# EAGLE board xbee_remote (EAGLE 6.3)
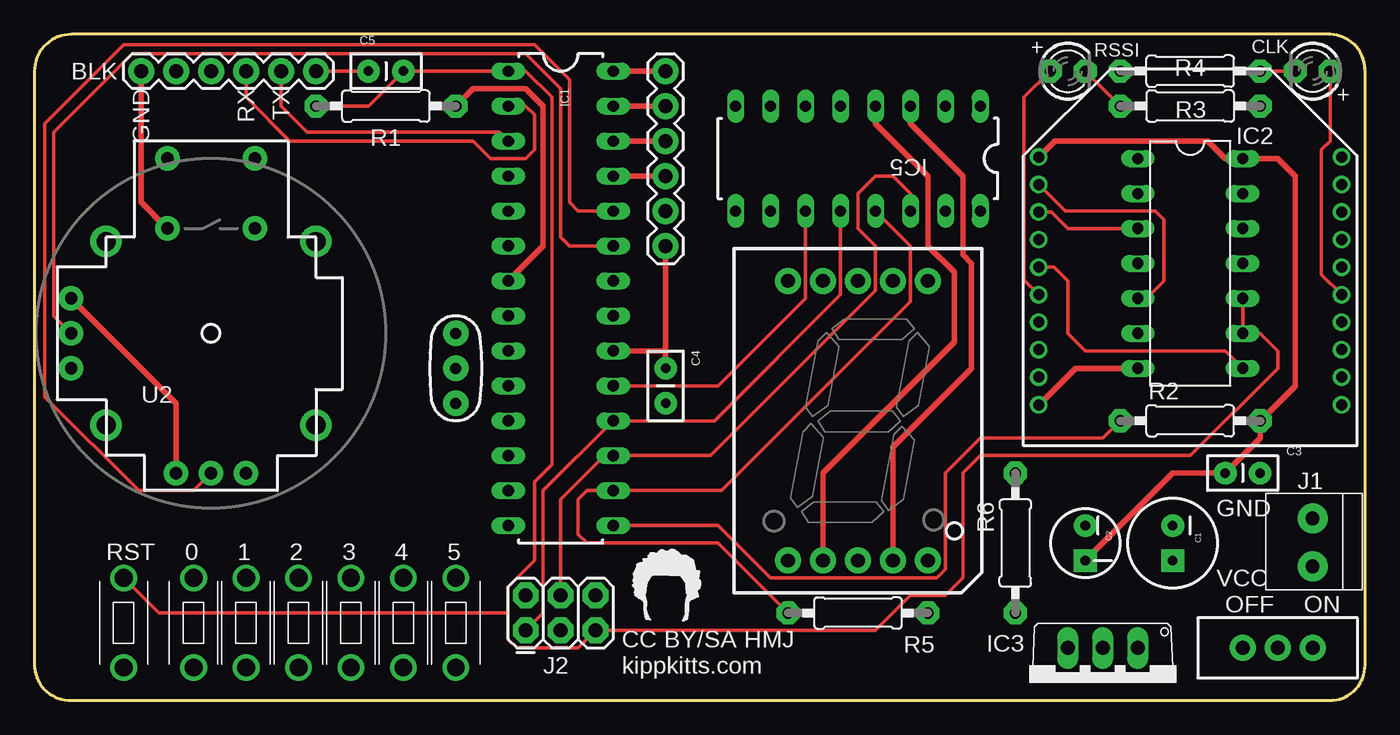
[diagram p0: board, top side]
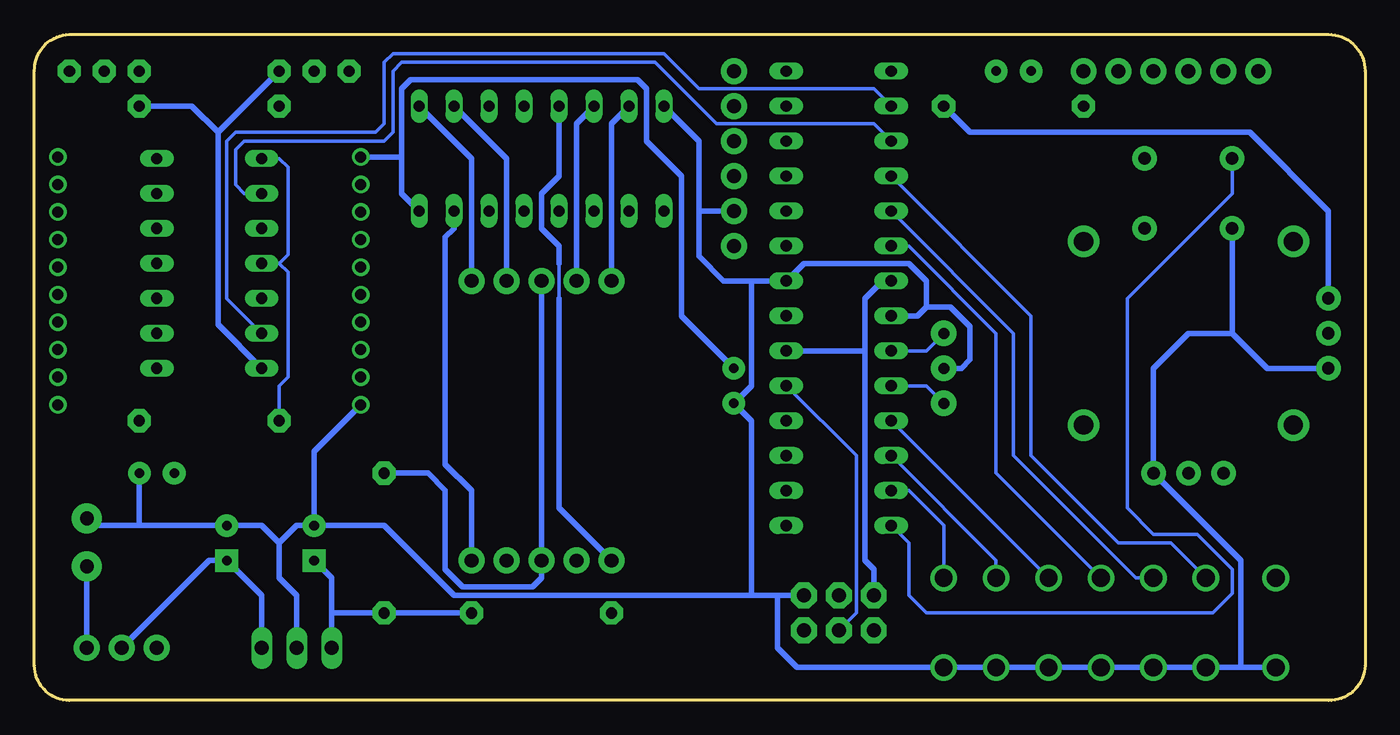
[diagram p1: board, bottom side, seen from below]

Size 96.65 x 48.39 mm. Coordinates in mm from the lower left corner, seen from the top.
Outline: 0,2.54 arc90 2.67,0 94.11,0 arc90 96.65,2.54 96.65,45.72 arc90 94.11,48.39 2.67,48.39 arc90 0,45.72 0,2.54
Copper layers (1*16): Top 0.0178mm / dielectric 59mil / Bottom 0.0178mm
Design rules "default": minimum track width 6mil, minimum drill 14mil, track to track 6mil, track to pad 6mil, pad to pad 6mil, via to via 6mil, smd to smd 6mil, copper to edge 20mil, drill to drill 16mil, minimum pad ring 8mil, minimum via ring 8mil, stop-mask expansion 3mil, vias tented up to drill 0mil, thermal gap 10mil

## Footprints (pad centres in the part's own frame; a part is rotated, then mirrored left to right if it is on the bottom)
CPOL-RADIAL-100UF-25V = drill 0.7 pad 1.651 square: 1 1.27,0 | drill 0.7 pad 1.651: 2 -1.27,0
CPOL-RADIAL-10UF-25V = drill 0.7 pad 1.651 square: 1 1.27,0 | drill 0.7 pad 1.651: 2 -1.27,0
CAP-PTH-SMALL2 = drill 0.7 pad 1.651: 1 0,0; 2 2.54,0
LED3MM = drill 0.813 pad 1.676 octagon: A -1.27,0; K 1.27,0
DIL28-3 = drill 0.813 long: 1 -16.51,-3.81; 2 -13.97,-3.81; 3 -11.43,-3.81; 4 -8.89,-3.81; 5 -6.35,-3.81; 6 -3.81,-3.81; 7 -1.27,-3.81; 8 1.27,-3.81; 9 3.81,-3.81; 10 6.35,-3.81; 11 8.89,-3.81; 12 11.43,-3.81; 13 13.97,-3.81; 14 16.51,-3.81; 15 16.51,3.81; 16 13.97,3.81; 17 11.43,3.81; 18 8.89,3.81; 19 6.35,3.81; 20 3.81,3.81; 21 1.27,3.81; 22 -1.27,3.81; 23 -3.81,3.81; 24 -6.35,3.81; 25 -8.89,3.81; 26 -11.43,3.81; 27 -13.97,3.81; 28 -16.51,3.81
DIL14 = drill 0.813 long: 1 -7.62,-3.81; 2 -5.08,-3.81; 3 -2.54,-3.81; 4 0,-3.81; 5 2.54,-3.81; 6 5.08,-3.81; 7 7.62,-3.81; 8 7.62,3.81; 9 5.08,3.81; 10 2.54,3.81; 11 0,3.81; 12 -2.54,3.81; 13 -5.08,3.81; 14 -7.62,3.81
TO220V = drill 1.016 long: 1 -2.54,-2.54; 2 0,-2.54; 3 2.54,-2.54
DIL16 = drill 0.813 long: 1 -8.89,-3.81; 2 -6.35,-3.81; 3 -3.81,-3.81; 4 -1.27,-3.81; 5 1.27,-3.81; 6 3.81,-3.81; 7 6.35,-3.81; 8 8.89,-3.81; 9 8.89,3.81; 10 6.35,3.81; 11 3.81,3.81; 12 1.27,3.81; 13 -1.27,3.81; 14 -3.81,3.81; 15 -6.35,3.81; 16 -8.89,3.81
3.5MMTERM = drill 1 pad 2.184: 1 1.8,0; 2 -1.7,0
2X3 = drill 1.016 pad 1.88 octagon: 1 0,0; 2 0,2.54; 3 2.54,0; 4 2.54,2.54; 5 5.08,0; 6 5.08,2.54
1X06 = drill 1.016 pad 1.88: 1 0,0; 2 2.54,0; 3 5.08,0; 4 7.62,0; 5 10.16,0; 6 12.7,0
0207/10 = drill 0.813 pad 1.676 octagon: 1 -5.08,0; 2 5.08,0
SWITCH-SPDT = drill 1.016 pad 1.88: 1 0,2.54; 2 0,0; 3 0,-2.54
JOYSTICK = drill 0.9 pad 1.778: B1A -3.175,12.7; B1B 3.175,12.7; B2A -3.175,7.62; B2B 3.175,7.62 | drill 0.889 pad 1.778: H1 -2.54,-10.16; H2 0,-10.16; H3 2.54,-10.16; V1 -10.16,2.54; V2 -10.16,0; V3 -10.16,-2.54 | drill 1.397 pad 2.286: MOUNT1 -7.62,6.668; MOUNT2 -7.62,-6.668; MOUNT3 7.62,-6.668; MOUNT4 7.62,6.668
7-SEGMENT-1"PTH = drill 1 pad 1.88: 1 -5.08,-10.16; 2 -2.54,-10.16; 3 0,-10.16; 4 2.54,-10.16; 5 5.08,-10.16; 6 5.08,10.16; 7 2.54,10.16; 8 0,10.16; 9 -2.54,10.16; 10 -5.08,10.16
TACT_TL1107 = drill 1.3: 1 0,0; 2 6.5,0
XBEE = drill 0.8 pad 1.27: 1 -11,9; 2 -11,7; 3 -11,5; 4 -11,3; 5 -11,1; 6 -11,-1; 7 -11,-3; 8 -11,-5; 9 -11,-7; 10 -11,-9; 11 11,-9; 12 11,-7; 13 11,-5; 14 11,-3; 15 11,-1; 16 11,1; 17 11,3; 18 11,5; 19 11,7; 20 11,9
RESONATOR-PTH = drill 0.8 pad 1.88: 1 -2.54,0; 2 0,0; 3 2.54,0

## Placement (x,y rotation side)
C1  100uF  [CPOL-RADIAL-100UF-25V]  82.68,11.43 270 top
C2  10uF  [CPOL-RADIAL-10UF-25V]  76.33,11.43 270 top
C3  .1uF  [CAP-PTH-SMALL2]  86.49,16.51 0 top
C4  .1uF  [CAP-PTH-SMALL2]  45.85,24.13 270 top
C5  .1uF  [CAP-PTH-SMALL2]  24.26,45.72 0 top
CLK  [LED3MM]  92.84,45.72 180 top
IC1  AVR-MEGA8-PPTH  [DIL28-3]  38.23,29.21 270 top
IC2  74LS125N  [DIL14]  83.95,31.75 270 top
IC3  UA78M33CKCS  [TO220V]  77.6,1.27 180 top
IC5  74LS595N  [DIL16]  59.82,39.37 180 top
J1  1X2-3.5MM  [3.5MMTERM]  92.84,11.43 90 top
J2  AVR ICSP  [2X3]  35.69,5.08 0 top
JP1  [1X06]  20.45,45.72 180 top
JP3  [1X06]  45.85,33.02 90 top
R1  10K  [0207/10]  25.53,43.18 0 top
R2  10K  [0207/10]  83.95,20.32 0 top
R3  150  [0207/10]  83.95,43.18 180 top
R4  150  [0207/10]  83.95,45.72 0 top
R5  10K  [0207/10]  59.82,6.35 0 top
R6  1K  [0207/10]  71.25,11.43 90 top
RSSI  [LED3MM]  75.06,45.72 0 top
S1  [SWITCH-SPDT]  90.3,3.81 270 top
U2  JOYSTICKPTH  [JOYSTICK]  12.83,26.67 0 top
U$2  [TOP_DOCU_5MM]  42.67,5.08 0 top
U$4  7-SEGMENT-DISPLAY-1"-RED  [7-SEGMENT-1"PTH]  59.82,20.32 0 top
U$8  TACT_TL1107  [TACT_TL1107]  6.48,8.89 270 top
U$9  TACT_TL1107  [TACT_TL1107]  11.56,8.89 270 top
U$10  TACT_TL1107  [TACT_TL1107]  15.37,8.89 270 top
U$11  TACT_TL1107  [TACT_TL1107]  19.18,8.89 270 top
U$12  TACT_TL1107  [TACT_TL1107]  22.99,8.89 270 top
U$13  TACT_TL1107  [TACT_TL1107]  26.8,8.89 270 top
U$14  TACT_TL1107  [TACT_TL1107]  30.61,8.89 270 top
XB1  XBEE  [XBEE]  83.95,30.48 0 top
Y1  RESONATORPTH  [RESONATOR-PTH]  30.61,24.13 270 top

## Library data of the parts
C1-C5 IC1 IC5 J2 JP1 JP3 S1 U2 U$4 Y1 = SparkFun
CLK J1 R1-R6 RSSI = adafruit
IC2 = 74xx-us
IC3 = linear
U$2 = KippkittsLogo
U$8-U$14 = customswitch
XB1 = hjohnson_library; MPN: XBP24-Z7UIT-004; OC_FARNELL: 1751799; OC_NEWARK: 34R5507

## Nets
1: IC5.5 U$4.1
2: IC5.4 U$4.2
3.3V: C2.1 C3.1 C4.1 IC1.7 IC1.20 IC2.14 IC3.3 IC5.16 J2.2 JP3.1 R1.2 R2.2 R5.2 R6.1 U2.H1 U2.V1 XB1.1
3V3_/RST: IC2.8 XB1.5
3V3_RX: IC2.5 XB1.2
3V3_TX: IC2.3 XB1.3
4: IC5.3 U$4.4
5: IC5.15 U$4.5
6: IC5.1 U$4.6
7: IC5.2 U$4.7
7_SEG_ENABLE: IC1.16 IC5.13 R5.1
9: IC5.6 U$4.9
10: IC5.7 U$4.10
/RES: C5.2 IC1.1 IC2.9 IC2.10 J2.5 R1.1 U$8.1
/XBEE_EN: IC1.15 IC2.1 IC2.4 R2.1
A2: IC1.25 JP3.3
A3: IC1.26 JP3.4
DS: IC1.17 IC5.14 J2.4
GND: C1.2 C2.2 C3.2 C4.2 IC1.8 IC1.22 IC2.7 IC3.2 IC5.8 J1.1 J2.6 JP1.6 JP3.2 R3.1 R4.1 U2.B2A U2.H3 U2.V3 U$8.2 U$9.2 U$10.2 U$11.2 U$12.2 U$13.2 U$14.2 XB1.10 Y1.2
IO0: IC1.4 U$9.1
IO1: IC1.5 U$10.1
IO2: IC1.6 U$11.1
IO3: IC1.11 U$12.1
IO4: IC1.12 U$13.1
IO5: IC1.13 U$14.1
IO_SEL: IC1.14 U2.B1A
N$1: IC1.9 Y1.1
N$2: IC1.10 Y1.3
N$4: J1.2 S1.1
N$8: C5.1 JP1.1
N$10: R6.2 U$4.3 U$4.8
N$24: RSSI.A XB1.6
N$25: R3.2 RSSI.K
N$26: CLK.A XB1.15
N$27: CLK.K R4.2
RX: IC1.2 IC2.6 JP1.3
SCL: IC1.28 JP3.6
SDA: IC1.27 JP3.5
SH_CP: IC1.19 IC5.11 J2.3
ST_CP: IC1.18 IC5.12 J2.1
TX: IC1.3 IC2.2 JP1.2
VIN: C1.1 IC3.1 S1.2
VIN_H: IC1.24 U2.H2
VIN_V: IC1.23 U2.V2

## Tracks (layer width: path | path; a pad name or v marks a point on that pad's centre or on a via)
1
  Bottom 0.254: 58.55,31.75 58.55,29.21
  Bottom 0.406: IC5.5 58.55,38.1 59.82,36.83 59.82,34.29 58.55,33.02 58.55,31.75 | 58.55,29.21 58.55,13.97 U$4.1
2
  Top 0.406: IC5.4 61.09,41.91 64.9,38.1 64.9,33.02 66.8,31.11 66.8,26.04 57.28,16.51 U$4.2
3.3V
  Top 0.406: R1.2 31.88,44.45 35.69,44.45 36.96,43.18 36.96,33.02 IC1.7 | XB1.1 74.11,40.64 85.22,40.64 86.49,39.37 IC2.14 90.3,39.37 91.57,38.1 91.57,22.86 R2.2 89.03,19.05 C3.1 82.68,16.51 C2.1 | 45.85,25.4 IC1.20 | U2.V1 10.29,21.59 U2.H1 | JP3.1 45.85,25.4 | 45.85,25.4 C4.1
  Bottom 0.406: J2.2 35.69,9.53 36.32,10.16 36.32,25.4 | 36.32,25.4 36.32,29.21 35.05,30.48 IC1.7 | R5.2 R6.1 75.06,6.35 | IC1.20 36.32,25.4 | 75.06,6.35 75.06,8.89 C2.1 | U2.V1 2.67,35.56 8.38,41.27 28.7,41.27 R1.2 | 75.06,6.35 IC3.3 | C4.1 49.66,27.94 49.66,38.1 52.2,40.64 52.2,44.45 52.83,45.09 69.34,45.09 69.98,44.45 69.98,39.37 | 69.98,39.37 70.09,39.48 XB1.1 | 69.98,39.37 69.98,36.83 IC5.16
3V3_/RST
  Top 0.254: IC2.8 86.49,25.4 76.33,25.4 75.06,26.67 75.06,30.48 74.06,31.48 XB1.5
3V3_RX
  Top 0.254: IC2.5 80.77,29.21 82.04,30.48 82.04,34.92 81.41,35.56 74.87,35.56 XB1.2
3V3_TX
  Top 0.254: IC2.3 75.06,34.29 73.87,35.48 XB1.3
4
  Top 0.406: IC5.3 63.63,41.91 67.44,38.1 67.44,32.38 68.07,31.75 68.07,24.13 62.36,18.41 U$4.4
5
  Bottom 0.406: IC5.15 66.17,34.29 66.8,33.66 66.8,17.14 64.9,15.24 U$4.5
6
  Bottom 0.406: U$4.6 64.9,39.37 IC5.1
7
  Bottom 0.406: U$4.7 62.36,39.37 IC5.2
7_SEG_ENABLE
  Top 0.254: R5.1 49.66,11.43 40.13,11.43 39.5,12.06 39.5,14.61 40.13,15.24 IC1.16 49.89,15.24 63.63,28.98 63.63,33.02 IC5.13
9
  Bottom 0.406: U$4.9 57.28,41.91 IC5.6
10
  Bottom 0.406: U$4.10 54.74,41.91 IC5.7
/RES
  Top 0.254: 34.42,6.35 34.42,4.45 35.05,3.81 39.5,3.81 J2.5 61.09,5.08 63.63,7.62 66.17,7.62 67.44,8.89 67.44,16.51 68.71,17.78 83.95,17.78 90.3,24.13 90.3,25.4 89.03,26.67 IC2.9 IC2.10 | 34.42,6.35 34.42,8.26 36.32,10.16 36.32,15.88 37.59,17.14 37.59,43.81 35.69,45.72 IC1.1 C5.2 24.26,43.18 R1.1 | 34.42,6.35 9.02,6.35 U$8.1
/XBEE_EN
  Top 0.254: IC1.15 49.66,12.7 53.47,8.89 65.53,8.89 66.17,9.53 66.17,16.51 68.71,19.05 77.6,19.05 R2.1
  Bottom 0.254: IC2.1 78.87,39.37 78.23,38.73 78.23,32.38 78.87,31.75 | 78.87,31.75 IC2.4 | R2.1 78.87,22.86 78.23,23.5 78.23,31.11 78.87,31.75
A2
  Top 0.406: IC1.25 JP3.3
A3
  Top 0.406: IC1.26 JP3.4
DS
  Top 0.254: J2.4 38.23,14.61 41.4,17.78 IC1.17 49.11,17.78 61.09,29.76 61.09,33.02 59.82,34.29 59.82,36.83 61.09,38.1 62.36,38.1 63.63,36.83 IC5.14
GND
  Top 0.406: IC2.7 75.6,24.13 XB1.10 | JP1.6 7.75,36.2 U2.B2A
  Bottom 0.406: 78.87,11.43 78.87,8.89 77.6,7.62 IC3.2 | 78.87,11.43 77.6,12.7 C2.2 | 78.87,11.43 80.14,12.7 C1.2 89.03,12.7 | 89.03,12.7 92.31,12.7 J1.1 | C3.2 89.03,12.7 | IC5.8 48.39,40.64 48.39,35.56 | 48.39,35.56 48.39,32.28 46.59,30.48 44.58,30.48 | 44.58,30.48 IC1.22 40.77,31.75 33.15,31.75 31.88,30.48 31.88,28.57 | 44.58,7.62 44.58,20.32 C4.2 44.58,22.86 44.58,30.48 | U$8.2 9.02,2.39 | 9.02,2.39 U$9.2 U$10.2 U$11.2 U$12.2 U$13.2 U$14.2 41.25,2.39 42.67,3.81 42.67,7.62 | U2.V3 7.11,24.13 9.65,26.67 | 9.65,26.67 U2.B2A | 9.65,26.67 12.83,26.67 15.37,24.13 U2.H3 9.02,10.16 9.02,2.39 | C2.2 76.33,18.1 XB1.10 | IC2.7 83.31,27.3 83.31,41.27 | 83.31,41.27 85.22,43.18 R3.1 | C2.2 71.25,12.7 66.17,7.62 44.58,7.62 | IC1.8 32.51,27.94 31.88,28.57 | 31.88,28.57 30.12,28.57 28.7,27.16 28.7,24.77 29.34,24.13 Y1.2 | 44.58,7.62 42.67,7.62 | 42.67,7.62 J2.6 | 83.31,41.27 R4.1 | JP3.2 48.39,35.56
IO0
  Bottom 0.254: U$9.1 14.1,11.43 17.91,11.43 24.26,17.78 24.26,27.94 IC1.4
IO1
  Bottom 0.254: U$10.1 16.64,8.89 25.53,17.78 25.53,26.67 IC1.5
IO2
  Bottom 0.254: U$11.1 26.8,16.51 26.8,26.67 33.15,33.02 IC1.6
IO3
  Bottom 0.254: U$12.1 IC1.11
IO4
  Bottom 0.254: U$13.1 26.8,10.16 IC1.12
IO5
  Bottom 0.254: U$14.1 30.61,12.7 33.15,15.24 IC1.13
IO_SEL
  Bottom 0.254: IC1.14 33.15,11.43 33.15,7.62 31.88,6.35 11.07,6.35 9.65,7.77 9.65,9.53 12.19,12.06 15.37,12.06 17.27,13.97 17.27,29.21 9.65,36.83 U2.B1A
N$1
  Bottom 0.254: IC1.9 31.88,25.4 Y1.1
N$2
  Bottom 0.254: IC1.10 31.88,22.86 Y1.3
N$4
  Bottom 0.406: J1.2 S1.1
N$8
  Top 0.254: JP1.1 C5.1
N$10
  Bottom 0.406: U$4.8 U$4.3 59.82,8.89 60.45,8.26 65.53,8.26 66.8,9.53 66.8,15.24 68.07,16.51 R6.2
N$24
  Top 0.254: XB1.6 71.88,30.55 71.88,43.81 RSSI.A
N$25
  Top 0.254: R3.2 RSSI.K
N$26
  Top 0.254: CLK.A 94.11,40.64 93.47,40.01 93.47,30.95 XB1.15
N$27
  Top 0.254: R4.2 CLK.K
RX
  Top 0.254: JP1.3 15.37,43.81 18.54,40.64 31.88,40.64 33.15,39.37 35.69,39.37 36.32,40.01 36.32,42.55 35.69,43.18 IC1.2
  Bottom 0.254: IC2.6 82.68,29.21 82.68,40.64 82.04,41.27 71.88,41.27 71.25,41.91 71.25,46.35 70.61,46.99 50.93,46.99 48.39,44.45 35.69,44.45 IC1.2
SCL
  Top 0.406: IC1.28 JP3.6
SDA
  Top 0.406: IC1.27 JP3.5
SH_CP
  Top 0.254: IC1.19 49.66,22.86 56.01,29.21 IC5.11
  Bottom 0.254: IC1.19 36.96,17.78 36.96,6.35 J2.3
ST_CP
  Top 0.254: J2.1 36.96,6.35 36.96,15.24 IC1.18 49.39,20.32 58.55,29.48 IC5.12
TX
  Top 0.254: JP1.2 17.91,43.18 19.81,41.27 33.78,41.27 IC1.3
  Bottom 0.254: IC2.2 81.41,36.83 82.04,37.47 82.04,40.01 81.41,40.64 71.25,40.64 70.61,41.27 70.61,45.72 69.98,46.35 51.56,46.35 49.66,44.45 47.12,41.91 35.69,41.91 IC1.3
VIN
  Bottom 0.406: S1.2 83.95,10.16 C1.1 80.14,7.62 IC3.1
VIN_H
  Top 0.254: IC1.24 39.5,35.56 38.86,36.2 38.86,45.09 36.32,47.62 6.48,47.62 0.76,41.91 0.76,22.04 7.56,15.24 11.56,15.24 U2.H2
VIN_V
  Top 0.254: U2.V2 1.4,27.94 1.4,41.27 7.11,46.99 35.69,46.99 38.23,44.45 38.23,33.66 38.86,33.02 IC1.23

## Text on the board
tPlace: BLK | GND | RX | TX | GND | RST | 0 | 1 | 2 | 3 | 4 | 5 | VCC | OFF | ON | CC BY/SA HMJ | kippkitts.com
Reference: 7-Segment block | XBEE block | Prog Block | VREG Block